# EAGLE board Schematic_1 (EAGLE 9.4.2)

Size 160 x 100 mm. Coordinates in mm from the lower left corner, seen from the top.
Outline: 0,0 160,0 160,100 0,100 0,0
Copper layers (1*16): Top 0.035mm / dielectric 1.5mm / Bottom 0.035mm
Design rules "default": minimum track width 6mil, minimum drill 0.35mm, track to track 6mil, track to pad 6mil, pad to pad 6mil, via to via 6mil, smd to smd 6mil, copper to edge 40mil, drill to drill 6mil, minimum pad ring 10mil, minimum via ring 8mil, stop-mask expansion 4mil, vias tented up to drill 0mil, thermal gap 10mil

## Footprints (pad centres in the part's own frame; a part is rotated, then mirrored left to right if it is on the bottom)
SOD80C = smd 1.4 x 1.8: A 1.7,0; C -1.7,0
GCT_USB4085-GF-A_REVA = drill 0.4 pad 0.65: A1 -2.975,4.025; A4 -2.125,4.025; A5 -1.275,4.025; A6 -0.425,4.025; A7 0.425,4.025; A8 1.275,4.025; A9 2.125,4.025; A12 2.975,4.025; B1 2.975,2.675; B4 2.125,2.675; B5 1.275,2.675; B6 0.425,2.675; B7 -0.425,2.675; B8 -1.275,2.675; B9 -2.125,2.675; B12 -2.975,2.675 | drill 0.6 long: P1 -4.325,3.045; P2 4.325,3.045; P3 4.325,-0.335; P4 -4.325,-0.335
LQFP48-7X7MM = smd 1.194 x 0.305: 1 -4.25,2.75; 2 -4.25,2.25; 3 -4.25,1.75; 4 -4.25,1.25; 5 -4.25,0.75; 6 -4.25,0.25; 7 -4.25,-0.25; 8 -4.25,-0.75; 9 -4.25,-1.25; 10 -4.25,-1.75; 11 -4.25,-2.25; 12 -4.25,-2.75; 25 4.25,-2.75; 26 4.25,-2.25; 27 4.25,-1.75; 28 4.25,-1.25; 29 4.25,-0.75; 30 4.25,-0.25; 31 4.25,0.25; 32 4.25,0.75; 33 4.25,1.25; 34 4.25,1.75; 35 4.25,2.25; 36 4.25,2.75 | smd 0.305 x 1.194: 13 -2.75,-4.25; 14 -2.25,-4.25; 15 -1.75,-4.25; 16 -1.25,-4.25; 17 -0.75,-4.25; 18 -0.25,-4.25; 19 0.25,-4.25; 20 0.75,-4.25; 21 1.25,-4.25; 22 1.75,-4.25; 23 2.25,-4.25; 24 2.75,-4.25; 37 2.75,4.25; 38 2.25,4.25; 39 1.75,4.25; 40 1.25,4.25; 41 0.75,4.25; 42 0.25,4.25; 43 -0.25,4.25; 44 -0.75,4.25; 45 -1.25,4.25; 46 -1.75,4.25; 47 -2.25,4.25; 48 -2.75,4.25
CHERRY-MX-LED = drill 1.016 pad 1.778: LED+ -1.27,-5.08; LED- 1.27,-5.08 | drill 1.714 pad 1.93: P$3 -5.08,0; P$4 5.08,0 | drill 1.524 pad 2.286: SW1 -3.81,2.54; SW2 2.54,5.08 | hole 4.064: 0,0

## Placement (x,y rotation side)
D1  [SOD80C]  -96.52,-15.24 0 top  (outside the outline)
D2  [SOD80C]  -96.52,-20.32 0 top  (outside the outline)
D3  [SOD80C]  -96.52,-25.4 0 top  (outside the outline)
D4  [SOD80C]  -96.52,-30.48 0 top  (outside the outline)
D5  [SOD80C]  -96.52,-53.34 0 top  (outside the outline)
D6  [SOD80C]  -96.52,-76.2 0 top  (outside the outline)
J1  USB4085-GF-A_REVA  [GCT_USB4085-GF-A_REVA]  -27.94,7.62 0 top  (outside the outline)
U1  STM32F0XXC2T  [LQFP48-7X7MM]  -26.67,-6.35 0 top  (outside the outline)
U$1  CHERRY-MX-LED  [CHERRY-MX-LED]  -41.91,-3.81 0 top  (outside the outline)
U$2  CHERRY-MX-LED  [CHERRY-MX-LED]  -58.42,-3.81 0 top  (outside the outline)
U$3  CHERRY-MX-LED  [CHERRY-MX-LED]  -74.93,-3.81 0 top  (outside the outline)
U$4  CHERRY-MX-LED  [CHERRY-MX-LED]  -91.44,-3.81 0 top  (outside the outline)
U$5  CHERRY-MX-LED  [CHERRY-MX-LED]  -91.44,-41.91 0 top  (outside the outline)
U$6  CHERRY-MX-LED  [CHERRY-MX-LED]  -91.44,-64.77 0 top  (outside the outline)

## Library data of the parts
D1-D6 = diode
J1 = USB4085-GF-A_REVA; AVAILABILITY: Unavailable; MF: Global Connector Technology; MP: USB4085-GF-A; PACKAGE: Package Analog Devices; PRICE: None
U1 = STM32F0XXC2T; MANUFACTURER_PART_NUMBER: STM32F0XXC2T; VENDOR: STMicroelectronics
U$1-U$6 = cherrymx

## Nets
COL1: D1.C D2.C D3.C D4.C D5.C D6.C
N$1: D2.A U$1.SW2
N$2: D1.A U$3.SW2
N$3: D3.A U$4.SW2
N$4: D6.A U$6.SW2
N$6: D4.A U$2.SW2
N$7: D5.A U$5.SW2
ROW1: U$1.SW1
ROW2: U$3.SW1
ROW3: U$4.SW1
ROW4: U$2.SW1
ROW5: U$5.SW1
ROW6: U$6.SW1
VBAT: U1.1
VBUS: J1.A4 J1.A9 J1.B4 J1.B9
VDD: U1.48
VDD_2: U1.24
VDDA: U1.9
VDDIO2: U1.36
VSS: U1.47
VSS_2: U1.23
VSS_3: U1.35
VSSA: U1.8

## Tracks (layer width: path | path; a pad name or v marks a point on that pad's centre or on a via)
COL1  (5 unrouted)
N$1  (1 unrouted)
N$2  (1 unrouted)
N$3  (1 unrouted)
N$4  (1 unrouted)
N$6  (1 unrouted)
N$7  (1 unrouted)
VBUS  (3 unrouted)